# EAGLE board generic_maxi_speed_1 (EAGLE 6.4)
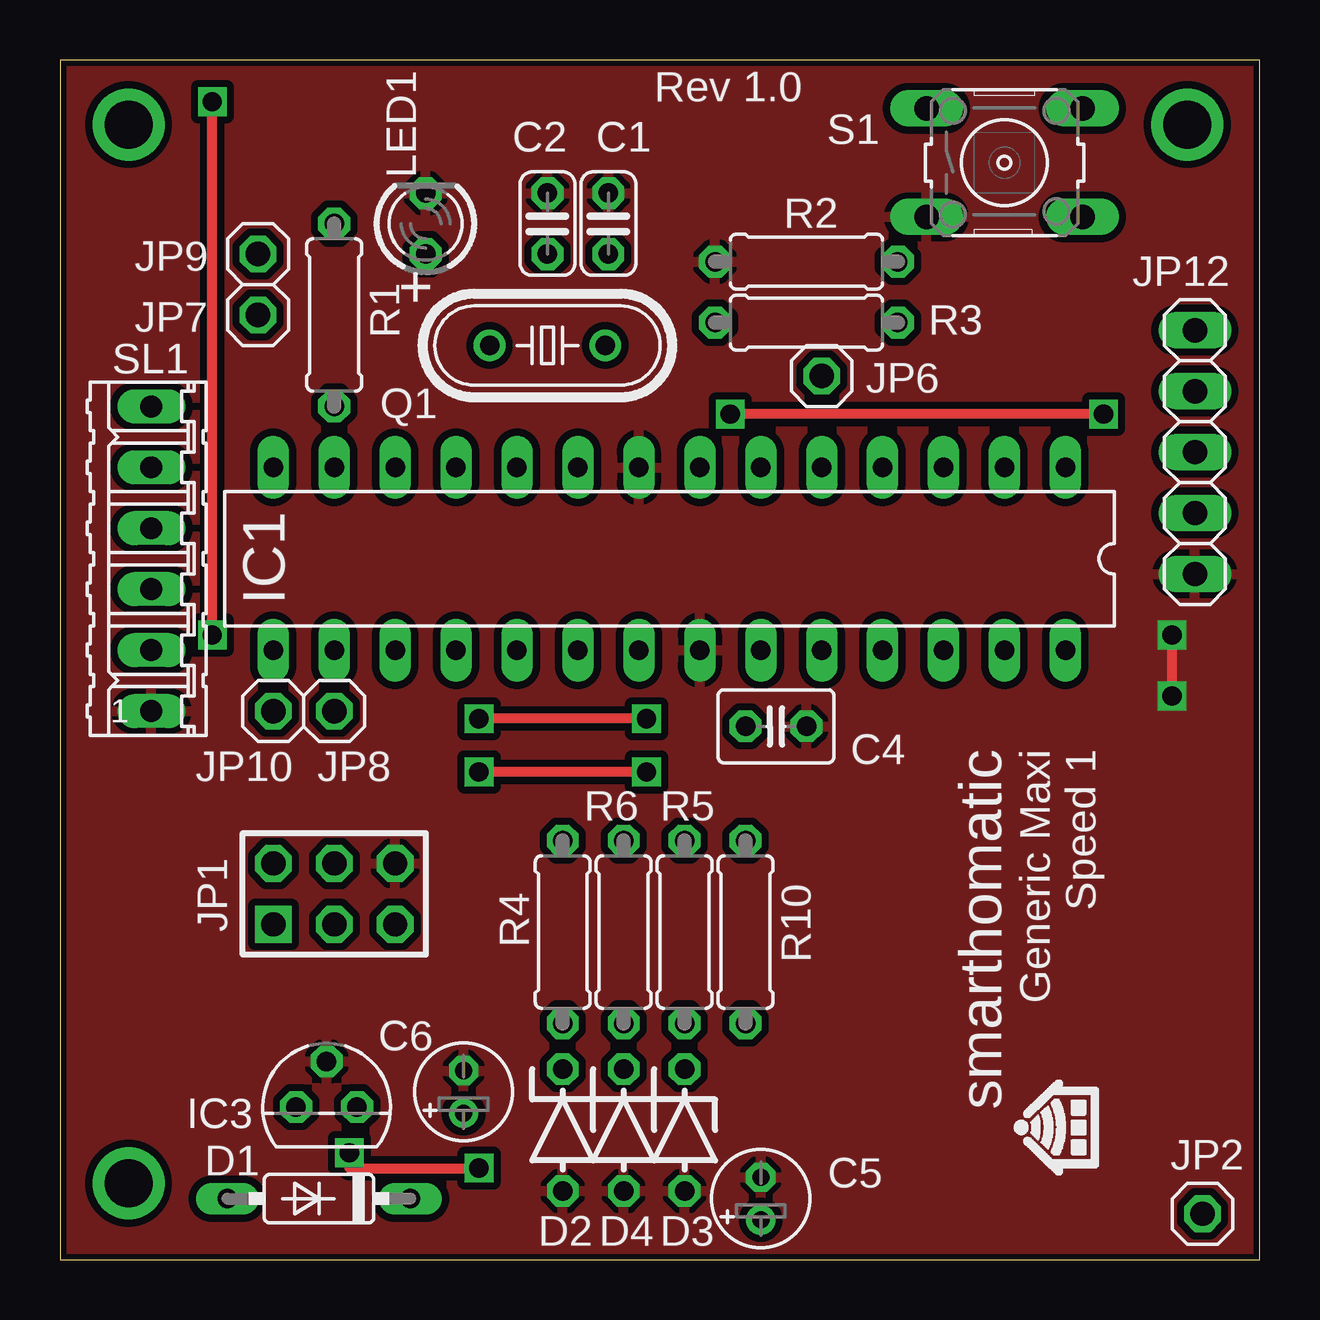
[diagram p0: board, top side]
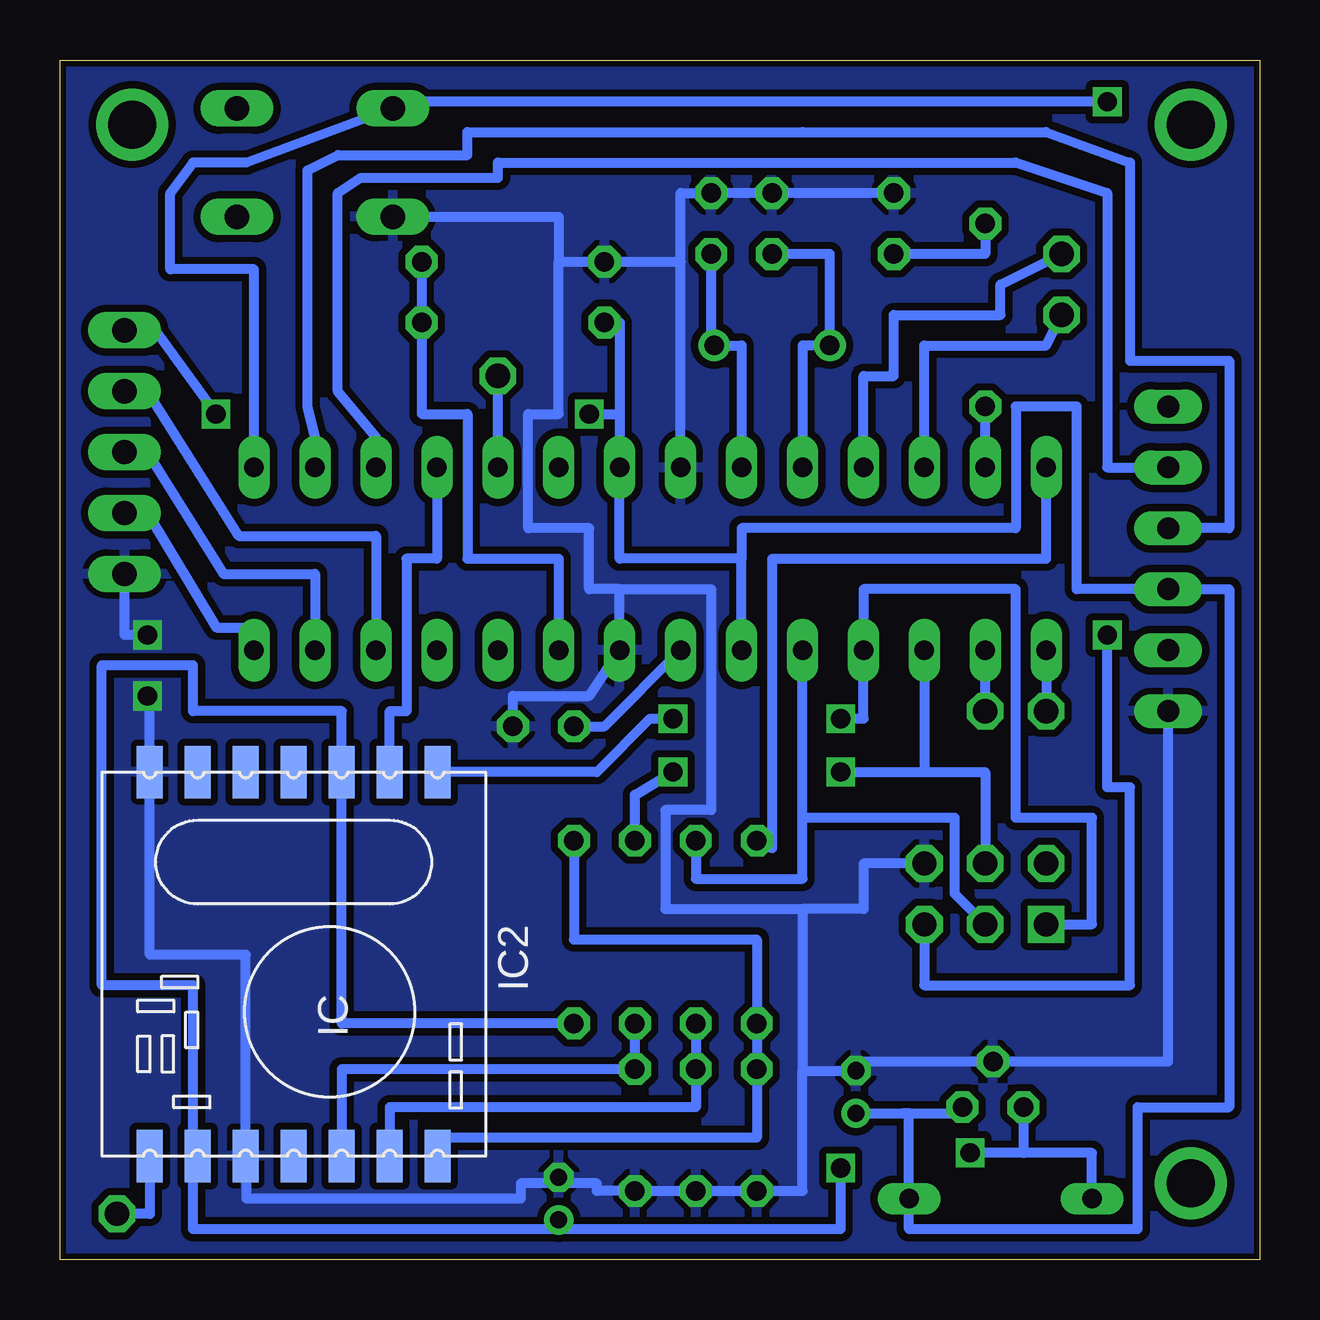
[diagram p1: board, bottom side, seen from below]

Size 50 x 50 mm. Coordinates in mm from the lower left corner, seen from the top.
Outline: 0,0 50,0 50,50 0,50 0,0
Copper layers (1*16): Top 0.035mm / dielectric 1.5mm / Bottom 0.035mm
Design rules "Fusion_eagle_rule_v1.1": minimum track width 6mil, minimum drill 12mil, track to track 6mil, track to pad 6mil, pad to pad 6mil, via to via 6mil, smd to smd 0mil, copper to edge 10mil, drill to drill 10mil, minimum pad ring 10mil, minimum via ring 6mil, stop-mask expansion 2mil, vias tented up to drill 100mil, thermal gap 10mil
Net classes: 0 default: clearance 0.305 mm

## Footprints (pad centres in the part's own frame; a part is rotated, then mirrored left to right if it is on the bottom)
C025-024X044 = drill 0.813 octagon: 1 -1.27,0; 2 1.27,0
C025-030X050 = drill 0.813 octagon: 1 -1.27,0; 2 1.27,0
E1,8-4 = drill 0.711 pad 1.168: + -0.889,0 | drill 0.711 pad 1.168 octagon: - 0.889,0
DO35-7 = drill 0.813 long: A 3.81,0; C -3.81,0
ZDIO-5 = drill 0.813 octagon: A 2.54,0; C -2.54,0
DIL28-3 = drill 0.813 long: 1 -16.51,-3.81; 2 -13.97,-3.81; 3 -11.43,-3.81; 4 -8.89,-3.81; 5 -6.35,-3.81; 6 -3.81,-3.81; 7 -1.27,-3.81; 8 1.27,-3.81; 9 3.81,-3.81; 10 6.35,-3.81; 11 8.89,-3.81; 12 11.43,-3.81; 13 13.97,-3.81; 14 16.51,-3.81; 15 16.51,3.81; 16 13.97,3.81; 17 11.43,3.81; 18 8.89,3.81; 19 6.35,3.81; 20 3.81,3.81; 21 1.27,3.81; 22 -1.27,3.81; 23 -3.81,3.81; 24 -6.35,3.81; 25 -8.89,3.81; 26 -11.43,3.81; 27 -13.97,3.81; 28 -16.51,3.81
RFM = smd 2.184 x 1.067: 1 0,14; 2 0,12; 3 0,10; 4 0,8; 5 0,6; 6 0,4; 7 0,2; 8 16,2; 9 16,4; 10 16,6; 11 16,8; 12 16,10; 13 16,12; 14 16,14
TO92 = drill 0.813 octagon: 1 -1.27,0; 2 0,1.905; 3 1.27,0
AVR-ISP-6 = drill 1.016 square: 1 -2.54,-1.27 | drill 1.016 octagon: 2 -2.54,1.27; 3 0,-1.27; 4 0,1.27; 5 2.54,-1.27; 6 2.54,1.27
1X01 = drill 1.016 octagon: 1 0,0
1X05 = drill 1.016 long: 1 -5.08,0; 2 -2.54,0; 3 0,0; 4 2.54,0; 5 5.08,0
LED3MM = drill 0.813 octagon: A -1.27,0; K 1.27,0
HC49/S = drill 0.813: 1 -2.413,0; 2 2.413,0
0207/7 = drill 0.813 octagon: 1 -3.81,0; 2 3.81,0
B3F-10XX = drill 1.016 long: 1 -3.251,2.261; 2 3.251,2.261; 3 -3.251,-2.261; 4 3.251,-2.261
06P = drill 0.914 long: 1 -6.35,0; 2 -3.81,0; 3 -1.27,0; 4 1.27,0; 5 3.81,0; 6 6.35,0

## Placement (x,y rotation side)
C1  22p  [C025-024X044]  22.86,43.18 270 top
C2  22p  [C025-024X044]  20.32,43.18 270 top
C4  220n  [C025-030X050]  29.84,22.23 180 top
C5  10µ  [E1,8-4]  29.21,2.54 90 top
C6  10µ  [E1,8-4]  16.83,6.99 90 top
D1  1N4148  [DO35-7]  10.79,2.54 180 top
D2  3.3V  [ZDIO-5]  20.95,5.4 270 top
D3  3.3V  [ZDIO-5]  26.04,5.4 270 top
D4  3.3V  [ZDIO-5]  23.5,5.4 270 top
IC1  MEGA168/328  [DIL28-3]  25.4,29.21 180 top
IC2  RFM12  [RFM]  48.26,20.32 270 bottom
IC3  LP2950Z  [TO92]  11.11,6.35 0 top
JP1  AVR-ISP-6  [AVR-ISP-6]  11.43,15.24 0 top
JP2  ANT  [1X01]  47.62,1.91 0 top
JP6  [1X01]  31.75,36.83 0 top
JP7  [1X01]  8.26,39.37 0 top
JP8  [1X01]  11.43,22.86 0 top
JP9  [1X01]  8.26,41.91 0 top
JP10  [1X01]  8.89,22.86 0 top
JP12  FEATURE  [1X05]  47.31,33.66 90 top
LED1  2mA  [LED3MM]  15.24,43.18 90 top
Q1  20MHz  [HC49/S]  20.32,38.1 0 top
R1  1K5  [0207/7]  11.43,39.37 90 top
R2  150k  [0207/7]  31.11,41.59 0 top
R3  330k  [0207/7]  31.11,39.05 180 top
R4  1k  [0207/7]  20.95,13.65 270 top
R5  1k  [0207/7]  26.04,13.65 270 top
R6  1k  [0207/7]  23.5,13.65 270 top
R10  1M  [0207/7]  28.57,13.65 90 top
S1  RES  [B3F-10XX]  39.37,45.72 0 top
SL1  FTDI Board  [06P]  3.81,29.21 90 top

## Library data of the parts
C1 C2 C4-C6 R1-R6 R10 = rcl
D1-D4 = diode
IC1 JP1 = avr-5-4.16
IC2 = hopeRF
IC3 = linear
JP2 JP6-JP10 JP12 = pinhead
LED1 = led
Q1 = crystal; OC_FARNELL: 1667008; OC_NEWARK: unknown
S1 = switch-omron; MPN: B3F-1000; OC_FARNELL: 176432; OC_NEWARK: 36M3542
SL1 = con-amp-quick; OC_FARNELL: unknown; OC_NEWARK: unknown

## Nets
+3V3: C5.+ D1.A IC2.3 IC2.9 IC3.1 R10.1
+5V: C6.+ D1.C IC1.7 IC1.20 IC3.3 JP12.5 R3.2 SL1.3
GND: C1.1 C2.1 C4.1 C5.- C6.- D2.A D3.A D4.A IC1.8 IC1.22 IC2.7 IC2.10 IC3.2 JP1.6 JP12.1 LED1.K R2.1 S1.3 SL1.1
N$1: C1.2 IC1.9 Q1.2
N$2: C2.2 IC1.10 Q1.1
N$3: IC1.17 JP1.4 R5.1
N$4: IC1.18 IC2.1 JP1.1
N$5: D4.C IC2.13 R6.2
N$6: IC1.28 JP12.2
N$7: IC1.19 JP1.3 R6.1
N$8: IC1.1 JP1.5 S1.1
N$9: IC1.3 SL1.5
N$10: IC1.2 SL1.4
N$11: IC1.27 JP12.3
N$12: LED1.A R1.2
N$14: IC1.26 JP12.4
N$15: IC1.4 IC2.2
N$16: D3.C IC2.12 R5.2
N$17: IC1.5 JP6.1
N$18: IC1.23 R2.2 R3.1
N$19: IC1.11 JP9.1
N$20: IC1.12 JP7.1
N$21: IC1.13 R1.1
N$22: IC1.15 JP10.1
N$23: IC1.16 JP8.1
N$24: C4.2 IC1.21
N$25: IC2.8 JP2.1
N$26: IC1.14 R4.1
N$27: D2.C IC2.14 R4.2 R10.2

## Tracks (layer width: path | path; a pad name or v marks a point on that pad's centre or on a via)
+3V3  (via drill 0.8)
  Top 0.406: v12.06,4.45 12.06,3.81 v17.46,3.81
  Bottom 0.406: 44.45,4.32 IC2.9 44.45,4.32 | 44.45,4.32 44.45,11.43 48.26,11.43 48.26,24.77 44.45,24.77 44.45,22.86 38.26,22.86 IC2.3 38.26,9.84 R10.1 | IC3.1 9.84,4.45 | 9.84,4.45 v12.06,4.45 | v17.46,3.81 17.46,1.27 29.21,1.27 | 44.45,4.32 44.45,1.27 29.21,1.27 | 29.21,1.27 C5.+ 29.21,1.27 | D1.A 6.99,4.45 9.84,4.45
+5V  (via drill 0.8)
  Top 0.406: v43.5,35.24 v27.94,35.24
  Bottom 0.406: C6.+ 14.84,6.1 14.61,6.1 | 14.61,6.1 12.38,6.1 IC3.3 | IC1.20 21.59,29.21 | 21.59,29.21 26.67,29.21 IC1.7 26.67,35.24 | R3.2 26.67,39.05 26.67,35.24 | 21.59,29.21 21.59,30.48 10.16,30.48 10.16,35.56 7.62,35.56 7.62,27.94 SL1.3 1.27,27.94 1.27,6.35 5.08,6.35 5.08,1.27 14.61,1.27 D1.C 14.61,6.1 | JP12.5 46.04,38.73 v43.5,35.24 | v27.94,35.24 26.67,35.24
GND  (via drill 0.8)
  Top 0.406: v46.35,23.5 v46.35,26.04
  Bottom 0.406: IC1.8 24.13,41.59 | 24.13,41.59 24.13,44.45 C1.1 C2.1 LED1.K | IC2.10 42.26,12.7 46.26,12.7 IC2.7 46.26,23.4 v46.35,23.5 | 19.05,7.87 19.05,2.86 D2.A D4.A D3.A 27.62,2.86 27.62,3.17 29.21,3.17 | 19.05,7.87 C6.- 16.83,8.26 IC3.2 3.81,8.26 SL1.1 | 19.05,14.61 19.05,7.87 | 19.05,14.61 24.77,14.61 24.77,18.73 22.86,18.73 22.86,27.94 26.67,27.94 | 24.13,41.59 R2.1 29.21,41.59 | 26.67,27.94 27.94,27.94 27.94,30.48 30.48,30.48 30.48,35.24 29.21,35.24 29.21,41.59 | 26.67,27.94 IC1.22 27.94,23.5 31.11,23.5 C4.1 | v46.35,26.04 47.31,26.04 JP12.1 | 42.23,4.13 42.23,2.54 30.8,2.54 30.8,3.17 29.21,3.17 | JP1.6 16.51,16.51 16.51,14.61 19.05,14.61 | 29.21,3.17 C5.- | S1.3 29.21,43.46 29.21,41.59
  pour Top: 0,0 49.85,0 49.85,50.16 0,50.16
  pour Bottom: 0,50.8 50.16,50.8 50.16,-0.64 0,-0.64
N$1
  Bottom 0.406: IC1.9 21.59,38.1 Q1.2 22.86,38.1 C1.2
N$2
  Bottom 0.406: IC1.10 19.05,38.1 Q1.1 17.91,41.91 C2.2
N$3  (via drill 0.8)
  Top 0.406: v24.45,20.32 v17.46,20.32
  Bottom 0.406: IC1.17 13.97,20.32 | 13.97,20.32 11.43,20.32 JP1.4 | v17.46,20.32 13.97,20.32 | R5.1 26.04,19.37 v24.45,20.32
N$4  (via drill 0.8)
  Top 0.406: v24.45,22.54 v17.46,22.54
  Bottom 0.406: JP1.1 6.99,13.97 6.99,18.41 10.16,18.41 10.16,27.94 16.51,27.94 IC1.18 16.51,22.54 v17.46,22.54 | 34.26,20.95 IC2.1 27.62,20.32 25.4,22.54 v24.45,22.54
N$5
  Bottom 0.406: IC2.13 36.26,6.35 34.29,6.35 23.5,6.35 D4.C R6.2
N$6
  Bottom 0.406: JP12.2 46.35,31.11 43.5,26.35 41.91,26.35 IC1.28
N$7
  Bottom 0.406: JP1.3 12.7,15.24 12.7,18.41 19.05,18.41 | 19.05,18.41 IC1.19 | R6.1 23.5,15.88 19.05,15.88 19.05,18.41
N$8  (via drill 0.8)
  Top 0.406: v6.35,26.04 v6.35,48.26
  Bottom 0.406: JP1.5 13.97,11.43 5.4,11.43 5.4,19.68 6.35,19.68 v6.35,26.04 | IC1.1 41.91,41.27 45.4,41.27 45.4,44.45 44.45,45.72 42.23,45.72 S1.1 arc90 35.84,48.26 v6.35,48.26
N$9
  Bottom 0.406: IC1.3 36.83,34.29 38.42,36.2 38.42,44.45 37.47,45.09 31.75,45.09 31.75,45.72 10.16,45.72 6.35,44.45 6.35,33.02 SL1.5
N$10
  Bottom 0.406: SL1.4 1.27,30.48 1.27,37.47 5.4,37.47 5.4,45.72 8.89,46.99 19.05,46.99 33.02,46.99 33.02,46.04 38.42,46.04 39.69,45.4 39.69,35.56 39.37,34.29 IC1.2
N$11
  Bottom 0.406: JP12.3 46.35,33.66 43.18,28.57 39.37,28.57 IC1.27
N$12
  Bottom 0.406: R1.2 11.43,41.91 LED1.A
N$13  (via drill 2)
  other vias: 2.86,47.31 2.86,3.17 46.99,47.31
N$14
  Bottom 0.406: JP12.4 46.35,36.2 42.55,30.16 36.83,30.16 IC1.26
N$15
  Bottom 0.406: IC1.4 34.29,29.21 35.56,29.21 35.56,22.86 36.26,22.86 IC2.2
N$16
  Bottom 0.406: IC2.12 38.26,7.62 38.26,7.94 D3.C R5.2
N$17
  Bottom 0.406: IC1.5 JP6.1
N$18
  Bottom 0.406: IC1.23 29.21,29.21 33.02,29.21 33.02,35.24 34.92,35.24 R3.1 R2.2
N$19
  Bottom 0.406: IC1.11 16.51,36.83 15.24,36.83 15.24,39.37 10.79,39.37 10.79,40.64 JP9.1
N$20
  Bottom 0.406: IC1.12 13.97,38.1 8.89,38.1 JP7.1
N$21
  Bottom 0.406: IC1.13 R1.1
N$22
  Bottom 0.406: IC1.15 JP10.1
N$23
  Bottom 0.406: JP8.1 IC1.16
N$24
  Bottom 0.406: C4.2 27.3,22.23 IC1.21
N$25
  Bottom 0.406: IC2.8 46.26,1.91 JP2.1
N$26
  Bottom 0.406: IC1.14 8.89,29.21 20.32,29.21 20.32,17.14 R4.1
N$27
  Bottom 0.406: R10.2 28.57,13.34 20.95,13.34 R4.2 D2.C 20.95,5.08 34.29,5.08 34.29,4.32 IC2.14

## Text on the board
tNames: Rev 1.0 | + | smarthomatic | Generic Maxi | Speed 1